# Altium PCB x-IMU3-SA-D3.PcbDoc
Units mm, origin at the board's own origin, x right, y up, seen from the top; angles counter-clockwise.
Board outline 14 x 10.5 mm, 2 copper layers (Top Layer, Bottom Layer), stack 1.569 mm thick; 11 components, 10 nets, 27 pads, 4 vias.
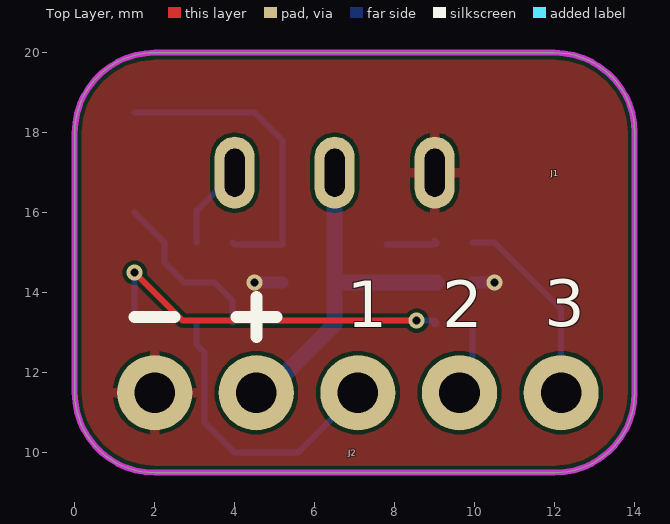
[diagram p0: Top Layer view]
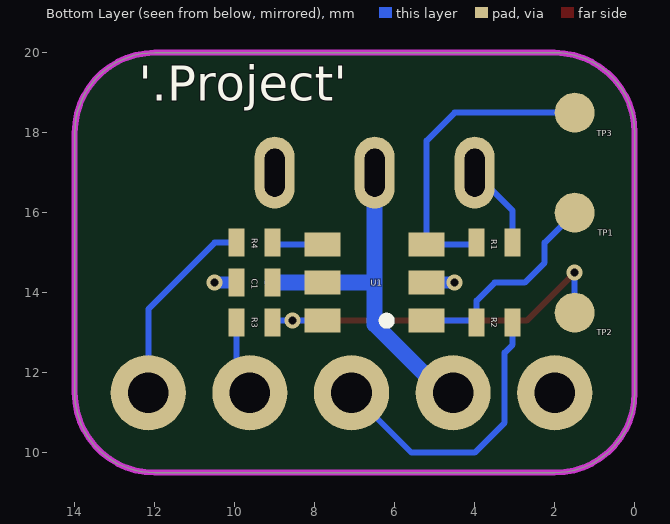
[diagram p1: Bottom Layer view, seen from below]

## Layer stack, top to bottom
Top Solder: solder mask 0.0254, SM-001, Dk 4
Top Layer: signal copper 0.035
Dielectric 1: core 1.4986, Core-043, Dk 4.3
Bottom Layer: signal copper 0.035
Bottom Solder: solder mask 0.0254, SM-001, Dk 4

## Board outline
2,9.5 cw(c2,11.5) 0,11.5 0,18 cw(c2,18) 2,20 12,20 cw(c12,18) 14,18 14,11.5 cw(c12,11.5) 12,9.5

## Design rules (kind name [scope] priority, off if disabled: settings)
Clearance [All] p1: gap=0.1 ignorepadtopadclearanceinfootprint=FALSE except(0: Arc-Hole Track-Hole SMDPad-Hole THPad-Hole Via-Hole Fill-Hole Poly-Hole Region-Hole Text-Hole)
DiffPairsRouting [All] p1: maxlimit=0.254 minlimit=0.1 mostfreqgap=0.1 toplayer_minwidth=0.1 toplayer_maxwidth=0.381 toplayer_prefwidth=0.1 bottomlayer_minwidth=0.1 bottomlayer_maxwidth=0.381 bottomlayer_prefwidth=0.1 maxuncoupledlength=12.7
MinimumSolderMaskSliver [All] p1: minsoldermaskwidth=0
PlaneClearance [All] p1: clearance=0.2
PlaneConnect [All] p1: planeconnectstyle=Direct reliefexpansion=0.508 reliefentries=4 reliefconductorwidth=0.254 reliefairgap=0.254
PolygonConnect [All] p1: thpad.connectstyle=Relief thpad.reliefconductorwidth=0.254 thpad.reliefentries=4 thpad.polygonreliefangle="90 Angle" thpad.airgapwidth=0.1 smdpad.connectstyle=Relief smdpad.reliefconductorwidth=0.254 smdpad.reliefentries=4 smdpad.polygonreliefangle="90 Angle" smdpad.airgapwidth=0.1 via.connectstyle=Direct via.reliefconductorwidth=0.254 via.reliefentries=4 via.polygonreliefangle="90 Angle" via.airgapwidth=0.254
RoutingVias [All] p1: holewidth=0.711 width=1.27 viastyle="Through Hole" minholewidth=0.2 minwidth=0.4 maxholewidth=0.711 maxwidth=1.27
SilkToSolderMaskClearance [IsPad] p1: minsilkscreentomaskgap=0.1 clearancetoexposedcopper=TRUE
SolderMaskExpansion [All] p1: expansion=0.102 istentingtop=FALSE
Width [All] p1: maxlimit=1 minlimit=0.1 preferedwidth=0.1
25 further rules are at their usual default settings.

## Components (designator, comment, footprint, x,y, rotation, side; value= is the part's Value field where it differs from the comment)
C1 "100nF" "Capacitor 0402" 9.5,14.25 r180 bottom
J1 "SP-3533-02" SP-3533-02 6.5,17 r180 top
J2 "Molex 90121-0765" "MOLEX 90121-0765" 2,11.5 r90 top
R1 "180R" "Resistor 0402" 3.5,15.25 r0 bottom
R2 "180R" "Resistor 0402" 3.5,13.25 r0 bottom
R3 "180R" "Resistor 0402" 9.5,13.25 r180 bottom
R4 "180R" "Resistor 0402" 9.5,15.25 r180 bottom
TP1 "Test Point" "Test Point 1mm" 1.5,16 r90 bottom
TP2 "Test Point" "Test Point 1mm" 1.5,13.5 r90 bottom
TP3 "Test Point" "Test Point 1mm" 1.5,18.5 r90 bottom
U1 "PIC10F322-I/OT" SOT-23-6 6.5,14.25 r90 bottom

## Footprints (in the part's own frame and the unit in brackets; to place one, negate y for a bottom-side part, rotate by r counter-clockwise, add the part's x,y. Pads: shape width x height; smd on the part's side, far side on the other; paste and mask are expansions set on the pad)
"Capacitor 0402" [mm]
  rect 0.4x0.7 smd: 1(-0.45,0) 2(0.45,0)
  body extent -0.5,-0.25 0.5,0.25, height 0.48
"MOLEX 90121-0765" [mil]
  round 74 hole 40: 1(0,0) 2(0,-100) 3(0,-200) 4(0,-300) 5(0,-400)
  body extent -433,-450 13,50, height 142
"Resistor 0402" [mm]
  rect 0.4x0.7 smd: 1(-0.45,0) 2(0.45,0)
  body extent -0.51,-0.25 0.49,0.25, height 0.34
SOT-23-6 [mm]
  rect 0.6x0.9 smd: 1(-0.95,-1.3) 2(0,-1.3) 3(0.95,-1.3) 4(0.95,1.3) 5(0,1.3) 6(-0.95,1.3)
  silkscreen extent -1.05,-0.4 -0.85,-0.2, body extent -1.4,-1.21 1.39,1.21, height 1.09
SP-3533-02 [mm]
  oval 1x1.8 hole 0.5 slot 1.2 at 90 deg: R(0,0) S(-2.5,0) T(2.5,0)
  body extent -21.85,-2.5 4.75,2.5, height 5
"Test Point 1mm" [mm]
  round 1 smd paste-100: 1(0,0)

## Part data
C1: library part Capacitor
R1 R2 R3 R4: library part Resistor

## Via types
v1: diameter 0.4, hole 0.2, Top Layer to Bottom Layer, tented both sides, 4 vias

## Nets (pads, with @x,y where several pads share a name; then routed paths per layer and width w, separated by ;. In a path a pad name is that pad's centre, name@x,y a point inside that pad or via, vN(x,y) a via of type N, cw(c..) or ccw(c..) an arc to the next point about the centre after c; other vN are vias at no path point)
CH1: R2.2 TP1.1 U1.1 | length 5.5
  Bottom Layer w0.15: TP1.1 2.25,15.25 2.25,14.75 2.75,14.25 3.5,14.25 3.95,13.8 R2.2 4,13.3 U1.1
"CH1 R": J2.3 R2.1 | length 7.3
  Bottom Layer w0.15: R2.1 3.05,12.7 3.25,12.5 3.25,10.75 4,10 5.58,10 J2.3
CH2: R3.2 TP2.1 U1.6 | length 9.9
  Top Layer w0.15: v1(1.5,14.5) 2.7,13.3 v1(8.55,13.3)
  Bottom Layer w0.15: TP2.1 v1(1.5,14.5) ; U1.6 v1(8.55,13.3) 9,13.3 R3.2 R3.2@9,13.2
"CH2 R": J2.4 R3.1 | length 1.9
  Bottom Layer w0.15: J2.4 9.95,11.83 R3.1
CH3: R4.2 U1.4 | length 1.3
  Bottom Layer w0.15: U1.4 9,15.2 R4.2 R4.2@9,15.3
"CH3 R": J2.5 R4.1 | length 5
  Bottom Layer w0.15: R4.1 10.5,15.25 12.16,13.59 J2.5
GND: C1.1 J1.S J2.1 U1.2 | length 1.2
  Bottom Layer w0.3: v1(4.5,14.25) U1.2 ; C1.1 v1(10.5,14.25)
TX: R1.2 TP3.1 U1.3 | length 7.9
  Bottom Layer w0.15: TP3.1 4.5,18.5 5.2,17.8 U1.3 4,15.2 R1.2
"TX R": J1.T R1.1 | length 2.1
  Bottom Layer w0.15: R1.1 3.05,16.05 J1.T
VDD: C1.2 J1.R J2.2 U1.5 | length 9
  Bottom Layer w0.4: J2.2 4.79,11.5 6.5,13.21 6.5,14.25 ; J1.R 6.5,14.25 ; C1.2 U1.5 6.5,14.25

## Polygon pours and split planes (outlines as drawn)
GND on Top Layer "GND_L01_P000" (solid, remove dead copper, pour order 0): 0,9.5 0,21 14,21 14,9.5

## Keep-outs
Keep-Out Layer:
  lines w0.15: 14,11.5 cw(c12,11.5) 12,9.5 2,9.5 cw(c2,11.5) 0,11.5 0,18 cw(c2,18) 2,20 12,20 cw(c12,18) 14,18 14,11.5 ; 14,11.5 14,11.5 ; 14,11.5 14,11.5

## Silkscreen, mask and mechanical layers (free items; w line width, h text height)
Top Overlay:
  lines w0.3: 1.5,13.392 2.5,13.392 ; 4.04,13.392 5.04,13.392 ; 4.54,12.892 4.54,13.892
  text "3" at 11.735,12.772 h2
  text "1" at 6.799,12.75 h2
  text "2" at 9.19,12.75 h2
Bottom Overlay:
  text "'.Project'" at 12.399,18.517 h1.5